# Altium PCB Dashboard.PcbDoc
Units mil, origin at the board's own origin, x right, y up, seen from the top; angles counter-clockwise.
Board outline 7400 x 4450 mil, 2 copper layers (Top Layer, Bottom Layer), stack 61.8 mil thick; 47 components, 44 nets, 205 pads, 0 vias.
Unrouted connection lines stored in the file: 118.
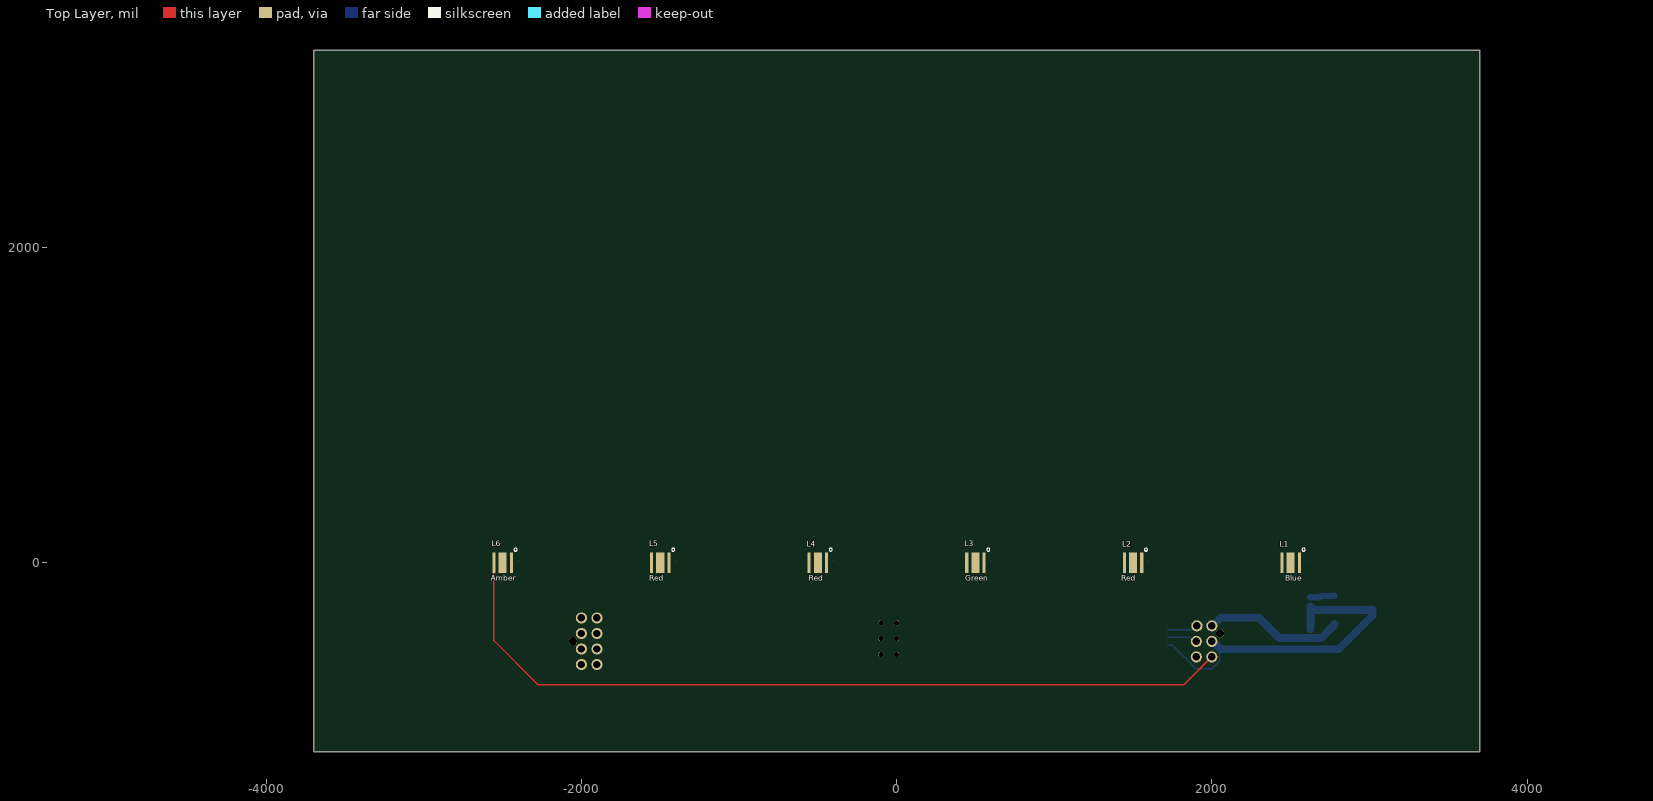
[diagram p0: Top Layer view]
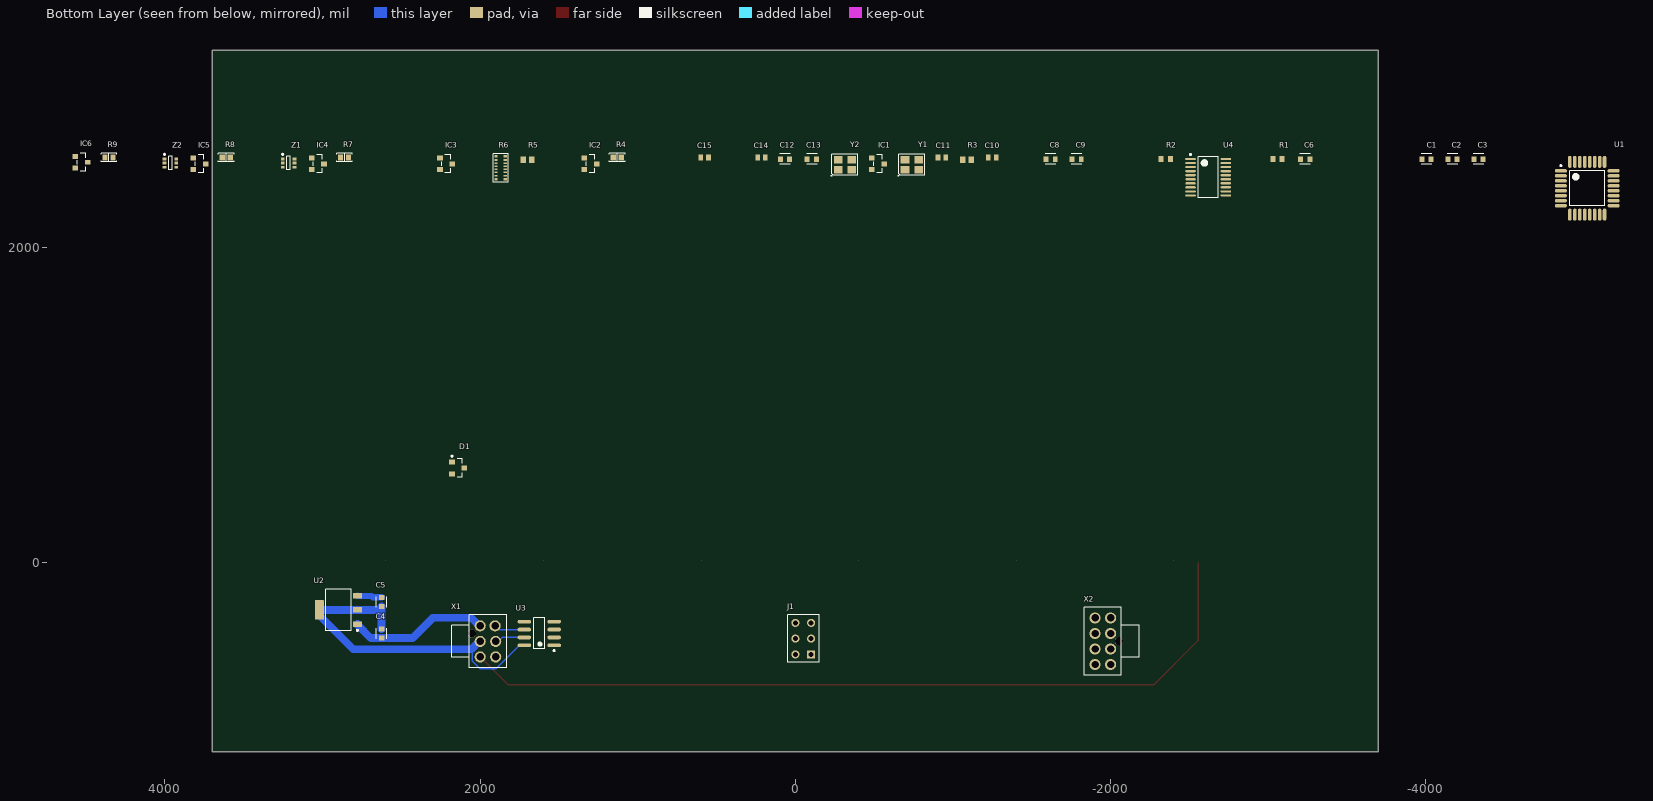
[diagram p1: Bottom Layer view, seen from below]

## Layer stack, top to bottom
Top Solder: solder mask 0.4, Solder Resist, Dk 3.5
Top Layer: signal copper 1.4
Dielectric 1: core 59, Core-043, Dk 4.3
Bottom Layer: signal copper 1.4
Bottom Solder: solder mask 0.4, Solder Resist, Dk 3.5

## Board outline
-3700,-1200 3700,-1200 3700,3250 -3700,3250

## Design rules (kind name [scope] priority, off if disabled: settings)
BoardOutlineClearance [All] p1: gap=7.87 ignorepadtopadclearanceinfootprint=FALSE except(15.75: Arc-SplitBarrior Arc-SplitContinuation Track-SplitBarrior Track-SplitContinuation SMDPad-SplitBarrior SMDPad-SplitContinuation THPad-SplitBarrior THPad-SplitContinuation Via-SplitBarrior Via-SplitContinuation Fill-SplitBarrior Fill-SplitContinuation Poly-SplitBarrior Poly-SplitContinuation Region-SplitBarrior Region-SplitContinuation Text-SplitBarrior Text-SplitContinuation)
Clearance "Clearance Bottom Layer" [OnLayer('Bottom Layer')] p1: gap=8 ignorepadtopadclearanceinfootprint=FALSE except(10: Arc-Text Track-Text SMDPad-Text THPad-Text Via-Text Fill-Text Poly-Text Region-Text Text-Text)
Clearance "Clearance Top Layer" [OnLayer('Top Layer')] p2: gap=8 ignorepadtopadclearanceinfootprint=FALSE except(10: Arc-Text Track-Text SMDPad-Text THPad-Text Via-Text Fill-Text Poly-Text Region-Text Text-Text)
Clearance [All] p3: gap=7.87 ignorepadtopadclearanceinfootprint=FALSE except(3.5: Arc-Arc Arc-Track Arc-SMDPad Track-Track Track-SMDPad SMDPad-SMDPad; 5: Arc-Via Track-Via SMDPad-Via THPad-Via Via-Via; 10: Arc-Text Track-Text SMDPad-Text THPad-Text Via-Text Fill-Text Poly-Text Region-Text Text-Text)
HoleSize [All] p1: absolutevalues=TRUE maxlimit=248.03 minlimit=7.87 maxpercent=80.000 minpercent=20.000
MinimumAnnularRing [All] p1: minimumring=3
MinimumSolderMaskSliver [All] p1: minsoldermaskwidth=3.94
PolygonConnect PolygonConnect_1 [All] p1: thpad.connectstyle=Relief thpad.reliefconductorwidth=20 thpad.reliefentries=4 thpad.polygonreliefangle="90 Angle" thpad.airgapwidth=10 smdpad.connectstyle=Relief smdpad.reliefconductorwidth=20 smdpad.reliefentries=4 smdpad.polygonreliefangle="90 Angle" smdpad.airgapwidth=10 via.connectstyle=Direct via.reliefconductorwidth=20 via.reliefentries=4 via.polygonreliefangle="90 Angle" via.airgapwidth=10
RoomDefinition Dashboard [InComponentClass('Dashboard')] p1 off: confinementstyle=ConfineIn formatcopy=TRUE lockcomponents=FALSE outline -5250,-1650 -3250,-1650 -3250,-650 -5250,-650
RoutingCorners [All] p1: cornerstyle=Round minsetback=100 maxsetback=100
RoutingVias [All] p1: holewidth=19.68 width=39.37 viastyle="Through Hole" minholewidth=7.87 minwidth=17.72 maxholewidth=39.37 maxwidth=78.74
SilkToSilkClearance [All] p1: silktosilkclearance=3.94
SilkToSolderMaskClearance [IsPad] p1: minsilkscreentomaskgap=3.94 clearancetoexposedcopper=TRUE
SolderMaskExpansion [All] p1: expansion=4 istentingtop=FALSE
Width Width_GND [InNet('GND')] p1: maxlimit=50 minlimit=10 preferedwidth=30
Width Width_12V [InNet('+12')] p2: maxlimit=100 minlimit=20 preferedwidth=50 minimp=50.000000 maximp=50.000000 favimp=50.000000
Width Width_5V [InNet('+5')] p3: maxlimit=40 minlimit=20 preferedwidth=32
Width [All] p4: maxlimit=10 minlimit=10 preferedwidth=10
25 further rules are at their usual default settings.

## Components (designator, comment, footprint, x,y, rotation, side; value= is the part's Value field where it differs from the comment)
C1 "CC0603KRX7R7BB104" FP-CC0603-DA-MFG -4004.38,2560 r180 bottom value="100 nF"
C2 "CC0603KRX7R7BB104" FP-CC0603-DA-MFG -4169.38,2560 r180 bottom value="100 nF"
C3 "CC0603KRX7R7BB104" FP-CC0603-DA-MFG -4334.38,2560 r180 bottom value="100 nF"
C4 "CC0603KRX7R8BB223" FP-CC0603-DA-MFG 2625,-450 r90 bottom value="22 nF"
C5 "CC0603KRX7R7BB104" FP-CC0603-DA-MFG 2625,-250 r270 bottom value="100 nF"
C6 "CC0603KRX7R7BB104" FP-CC0603-DA-MFG -3234.38,2560 r180 bottom value="100 nF"
C8 "CC0603KRX7R7BB104" FP-CC0603-DA-MFG -1619.38,2560 r180 bottom value="100 nF"
C9 "CC0603KRX7R7BB105" FP-CC0603-DA-MFG -1784.38,2560 r180 bottom value="1 uF"
C10 "06032U150GAT2A" CAPC1508X91X25LL25T13 -1249.38,2570 r180 bottom
C11 "06032U150GAT2A" CAPC1508X91X25LL25T13 -929.38,2570 r180 bottom
C12 "CC0603KRX7R7BB105" FP-CC0603-DA-MFG 65.62,2560 r180 bottom value="1 uF"
C13 "CC0603KRX7R7BB104" FP-CC0603-DA-MFG -104.38,2560 r180 bottom value="100 nF"
C14 "06032U150GAT2A" CAPC1508X91X25LL25T13 215.62,2570 r180 bottom
C15 "06032U150GAT2A" CAPC1508X91X25LL25T13 575.62,2570 r180 bottom
D1 "MMBZ5261ELT1G" ONSC-SOT-23-3-318-08_V 2139.37,600 r180 bottom
IC1 "DMG3406L-7" "DIODES SOT-23-3" -524.38,2530 r180 bottom
IC2 "DMG3406L-7" "DIODES SOT-23-3" 1300.62,2530 r180 bottom
IC3 "DMG3406L-7" "DIODES SOT-23-3" 2215.62,2530 r180 bottom
IC4 "DMG3406L-7" "DIODES SOT-23-3" 3030.62,2530 r180 bottom
IC5 "DMG3406L-7" "DIODES SOT-23-3" 3780.62,2530 r180 bottom
IC6 "DMG3406L-7" "DIODES SOT-23-3" 4530.62,2540 r180 bottom
J1 "AVR-ISP_Header" "AVR-ISP Header" 0,-482.68 r90 bottom locked
L1 "Blue" "Cree XLamp" 2500,0 r0 top locked
L2 "Red" "Cree XLamp" 1500,0 r0 top locked
L3 "Green" "Cree XLamp" 500,0 r0 top locked
L4 "Red" "Cree XLamp" -500,0 r0 top
L5 "Red" "Cree XLamp" -1500,0 r0 top locked
L6 "Amber" "Cree XLamp" -2500,0 r0 top locked
R1 "RC0603FR-0710KL" RESC1608X55X25ML10T15 -3059.38,2560 r180 bottom
R2 "RC0603FR-0710KL" RESC1608X55X25ML10T15 -2349.38,2560 r180 bottom
R3 "CRCW060310R0FKEA" RESC1609X50X30ML10T20 -1089.38,2555 r180 bottom
R4 "14.7 Ohms" "RES 0603_1608" 1130.62,2570 r180 bottom
R5 "CRCW060310R0FKEA" RESC1609X50X30ML10T20 1700.62,2555 r180 bottom
R6 "EXB-2HV103JV" "RESNET 1506-16 CONVEX" 1870.62,2505 r180 bottom
R7 "14.7 Ohms" "RES 0603_1608" 2860.62,2570 r180 bottom
R8 "14.7 Ohms" "RES 0603_1608" 3610.62,2570 r180 bottom
R9 "14.7 Ohms" "RES 0603_1608" 4355.62,2570 r180 bottom
U1 "ATmega328P-AU" 32A_M -5024.38,2375 r180 bottom
U2 "LM340MP-5.0/NOPB" DCY0004A_L 2900,-300 r0 bottom locked
U3 "MCP2551-I/SN" SOIC-SN8_N 1625,-450 r0 bottom
U4 "MCP2515-I/ST" TSSOP-ST20_N -2619.38,2445 r180 bottom
X1 "Nano-Fit Vertical 6" "Nano-Fit Vertical 6" 2000,-500 r270 bottom locked
X2 "Nano-Fit Vertical 8" "NANO-FIT VERTICAL 8" -2000,-499.21 r90 bottom locked
Y1 "16MHz" "NDK NX3225SA" -739.38,2525 r180 bottom
Y2 "16MHz" "NDK NX3225SA" -314.38,2525 r180 bottom
Z1 "MMBZ5245BTS-7-F" SOT-363 3215.62,2535 r180 bottom
Z2 "MMBZ5245BTS-7-F" SOT-363 3965.62,2535 r180 bottom

## Footprints (in the part's own frame and the unit in brackets; to place one, negate y for a bottom-side part, rotate by r counter-clockwise, add the part's x,y. Pads: shape width x height; smd on the part's side, far side on the other; paste and mask are expansions set on the pad)
32A_M [mm] "Thin QFP, 32-Leads, Body 7x7mm, Pitch 0.8mm, IPC Low Density"
  oval 1.95x0.6 smd: 1(-4.25,2.8) 2(-4.25,2) 3(-4.25,1.2) 4(-4.25,0.4) 5(-4.25,-0.4) 6(-4.25,-1.2) 7(-4.25,-2) 8(-4.25,-2.8) 17(4.25,-2.8) 18(4.25,-2) 19(4.25,-1.2) 20(4.25,-0.4) 21(4.25,0.4) 22(4.25,1.2) 23(4.25,2) 24(4.25,2.8)
  oval 0.6x1.95 smd: 9(-2.8,-4.25) 10(-2,-4.25) 11(-1.2,-4.25) 12(-0.4,-4.25) 13(0.4,-4.25) 14(1.2,-4.25) 15(2,-4.25) 16(2.8,-4.25) 25(2.8,4.25) 26(2,4.25) 27(1.2,4.25) 28(0.4,4.25) 29(-0.4,4.25) 30(-1.2,4.25) 31(-2,4.25) 32(-2.8,4.25)
  silkscreen extent -4.38,-2.85 2.85,3.77, body extent -3.5,-3.5 3.5,3.5, height 1.2
"AVR-ISP Header" [mm]
  round 1.308 / inner round 1.308 / far side round 0.8 hole 0.8: GND(2.54,0) MOSI(0,0) RST(2.54,-2.54) SCK(0,-2.54) VCC(-2.54,0)
  rect 1.308x1.308 / inner round 1.308 / far side round 0.8 hole 0.8: MISO(-2.54,-2.54)
  silkscreen extent -3.81,-3.81 3.81,1.27
CAPC1508X91X25LL25T13 [mm] "Chip Capacitor, 2-Leads, Body 1.52x0.76mm, IPC High Density"
  rect 0.74x0.92 smd: 1(-0.62,0) 2(0.62,0)
  body extent -0.88,-0.51 0.89,0.51, height 0.91
"Cree XLamp" [mm] "XP-E2"
  rect 1.3x3.3 smd: 3(0,0)
  rect 0.5x3.3 smd: V+(-1.4,0) V-(1.4,0)
  Keep-Out Layer region: 2.5,0.3
  silkscreen extent 1.83,1.83 2.34,2.34, body extent -1.72,-1.72 1.73,1.73, height 2.26
DCY0004A_L [mm] "SOT223, 4-Leads, Body 6.7x3.7mm, Pitch 2.3mm, IPC High Density"
  rrect11% 1.45x0.9 smd: 1(-3.075,2.3) 2(-3.075,0) 3(-3.075,-2.3)
  rrect7% 1.45x3.15 smd: 4(3.075,0)
  silkscreen extent -3.2,-3.35 2.05,3.42, body extent -3.5,-3.25 3.5,3.25, height 1.62
"DIODES SOT-23-3" [mm] "SOT23, 3-Leads, Body 2.90x2.40mm, Pitch 0.95mm, IPC Medium Density"
  rect 0.9x0.8 smd: 1(-1,0.95) 2(-1,-0.95) 3(1,0)
  silkscreen extent -0.7,-1.45 0.7,1.45, body extent -1.41,-1.45 1.41,1.45, height 1.5
FP-CC0603-DA-MFG [mm]
  rect 0.8x0.9 smd: 1(-0.75,0) 2(0.75,0)
  silkscreen extent -0.85,-0.85 0.85,0.85, body extent -0.8,-0.4 0.8,0.4, height 0.9
"Nano-Fit Vertical 6" [mm]
  round 1.8 hole 1.2: 1(-2.5,0) 2(0,0) 3(2.5,0) 4(-2.5,2.4) 5(0,2.5) 6(2.5,2.5)
  round 1.3 hole 1.3 unplated: 7(-1.25,-1.34)
  silkscreen extent -4.25,-4.6 4.25,4.25, body extent -4.22,-4.6 4.22,4.24, height 10.51
"NANO-FIT VERTICAL 8" [mm]
  round 1.8 hole 1.2: 1(-3.75,0) 2(-1.25,0) 3(1.25,0) 4(3.75,0) 5(-3.75,2.5) 6(-1.25,2.5) 7(1.25,2.5) 8(3.75,2.5)
  round 1.3 hole 1.3 unplated: 9(0,-1.34)
  silkscreen extent -5.5,-4.6 5.5,4.25, body extent -5.47,-4.57 5.47,4.27, height 10.51
"NDK NX3225SA" [mm] "Crystal, 4-Leads, Body 2.50x3.20mm, Pitch 2.20mm, IPC Medium Density"
  rect 1.4x1.2 smd: 1(-1.1,-0.8) 2(1.1,-0.8) 3(1.1,0.8) 4(-1.1,0.8)
  silkscreen extent -2.25,-1.85 2.1,1.7, body extent -1.61,-1.26 1.61,1.26, height 0.6
ONSC-SOT-23-3-318-08_V [mm] "SOT23, 3-Leads, Body 2.92x1.3mm, Pitch 0.95mm"
  rect 0.9x0.8 smd: 1(-1,0.95) 2(-1,-0.95) 3(1,0)
  silkscreen extent -1.13,-1.46 0.65,2.02, body extent -0.65,-1.46 0.65,1.46, height 1.11
"RES 0603_1608" [mm] "Chip Resistor, 2-Leads, Body 1.60x0.80mm, IPC Medium Density"
  rect 0.85x0.95 smd: 1(-0.65,0) 2(0.65,0)
  silkscreen extent -1.27,-0.7 1.27,0.7, body extent -0.8,-0.4 0.8,0.4, height 0.45
RESC1608X55X25ML10T15 [mm] "Chip Resistor, 2-Leads, Body 1.60x0.80mm, IPC Low Density"
  rect 0.8x1 smd: 1(-0.75,0) 2(0.75,0)
  body extent -0.85,-0.45 0.85,0.45, height 0.55
RESC1609X50X30ML10T20 [mm] "Chip Resistor, 2-Leads, Body 1.55x0.85mm, IPC Low Density"
  rect 0.9x1.05 smd: 1(-0.675,0) 2(0.675,0)
  body extent -0.82,-0.48 0.82,0.48, height 0.5
"RESNET 1506-16 CONVEX" [mm] "Array Chip Resistor, 16 leads, 8 resistors, Body 3.8x1.6mm Height 0.55mm"
  rect 0.5x0.425 smd: 1(-0.75,1.837) 8(-0.75,-1.837) 9(0.75,-1.837) 16(0.75,1.837)
  rect 0.5x0.25 smd: 2(-0.75,1.25) 3(-0.75,0.75) 4(-0.75,0.25) 5(-0.75,-0.25) 6(-0.75,-0.75) 7(-0.75,-1.25) 10(0.75,-1.25) 11(0.75,-0.75) 12(0.75,-0.25) 13(0.75,0.25) 14(0.75,0.75) 15(0.75,1.25)
  silkscreen extent -1.2,-2.3 1.2,2.3, body extent -0.82,-1.95 0.83,1.95, height 0.51
SOIC-SN8_N [mm] "SOIC, 8-Leads, Body 4.9x3.9mm, Pitch 1.27mm, IPC Medium Density"
  oval 2.2x0.6 smd: 1(-2.4,1.905) 2(-2.4,0.635) 3(-2.4,-0.635) 4(-2.4,-1.905) 5(2.4,-1.905) 6(2.4,-0.635) 7(2.4,0.635) 8(2.4,1.905)
  silkscreen extent -2.52,-2.5 0.9,2.88, body extent -2,-2.5 2,2.5, height 1.75
SOT-363 [mm]
  rect 0.6x0.42 smd: 1(-0.95,0.65) 2(-0.95,0) 3(-0.95,-0.65) 4(0.95,-0.65) 5(0.95,0) 6(0.95,0.65)
  silkscreen extent -1.08,-1.1 0.3,1.53, body extent -1.06,-1.1 1.06,1.1, height 1.05
TSSOP-ST20_N [mm] "TSOP, 20-Leads, Body 6.5x4.4mm, Pitch 0.65mm, IPC Medium Density"
  oval 1.7x0.35 smd: 1(-2.85,2.925) 2(-2.85,2.275) 3(-2.85,1.625) 4(-2.85,0.975) 5(-2.85,0.325) 6(-2.85,-0.325) 7(-2.85,-0.975) 8(-2.85,-1.625) 9(-2.85,-2.275) 10(-2.85,-2.925) 11(2.85,-2.925) 12(2.85,-2.275) 13(2.85,-1.625) 14(2.85,-0.975) 15(2.85,-0.325) 16(2.85,0.325) 17(2.85,0.975) 18(2.85,1.625) 19(2.85,2.275) 20(2.85,2.925)
  silkscreen extent -2.98,-3.3 1.6,3.77, body extent -2.25,-3.3 2.25,3.3, height 1.2

## Part data
C1 C2 C3 C5 C6 C8 C13: library part CMP-03422-000030-1, "CAP CER 0.1UF 16V X7R 0603", Capacitance="100 nF", Manufacturer=YAGEO, Package=CC0603-DA, Temperature="-55°C to +125°C", Temperature Characteristic=X7R, Temperature Coefficient=15%, Temperature Range High=+125°C, Temperature Range Low=-55°C, Tolerance=0.1, Voltage="16 V", Automotive=No, Category=Cap, ComponentLink2Description=Datasheet, ComponentLink2URL=http://www.yageo.com/documents/recent/UPY-GPHC_X7R_6.3V-to-50V_18.pdf, Device Class L1="Passive Components", Device Class L2=Capacitors, Device Class L3="Ceramic Capacitors", Digikey Description="CAP CER 0.1UF 16V X7R 0603", Footprint Url=http://www.yageo.com/exep/pages/download/literatures/UPY-C_GEN_24.pdf, Height=0.9mm, Lead Free=Yes, Manufacturer Part Number=CC0603KRX7R7BB104, Material=Ceramic, Mouser Description="Multilayer Ceramic Capacitor, CC Series, 0.1 - F, - 10%, X7R, 16 V, 0603 [1608 Metric]", Octopart=https://octopart.com/cc0603krx7r7bb104-yageo-192941, RoHS=TRUE, Voltage Rating="16 V"
C4: library part CMP-03422-001178-1, "CAP CER 0.022UF 25V X7R 0603", Capacitance="22 nF", Manufacturer=YAGEO, Package=CC0603-DA, Temperature="-55°C to +125°C", Temperature Characteristic=X7R, Temperature Coefficient=15%, Temperature Range High=+125°C, Temperature Range Low=-55°C, Tolerance=0.1, Voltage="25 V", Automotive=No, Category=Cap, ComponentLink2Description=Datasheet, ComponentLink2URL=http://www.yageo.com/documents/recent/UPY-GPHC_X7R_6.3V-to-50V_18.pdf, Device Class L1="Passive Components", Device Class L2=Capacitors, Device Class L3="Ceramic Capacitors", Digikey Description="CAP CER 0.022UF 25V X7R 0603", Footprint Url=http://www.yageo.com/exep/pages/download/literatures/UPY-C_GEN_24.pdf, Height=0.9mm, Lead Free=Yes, Manufacturer Part Number=CC0603KRX7R8BB223, Material=Ceramic, Mouser Description="Multilayer Ceramic Capacitors MLCC - SMD/SMT 22nF 25V X7R 10%", Octopart=https://octopart.com/cc0603krx7r8bb223-yageo-39467728, RoHS=TRUE, Voltage Rating="25 V"
C9 C12: library part CMP-03422-000924-1, "CAP CER 1UF 16V X7R 0603", Capacitance="1 uF", Manufacturer=YAGEO, Package=CC0603-DA, Temperature="-55°C to +125°C", Temperature Characteristic=X7R, Temperature Coefficient=15%, Temperature Range High=+125°C, Temperature Range Low=-55°C, Tolerance=0.1, Voltage="16 V", Automotive=No, Category=Cap, ComponentLink2Description=Datasheet, ComponentLink2URL=http://www.yageo.com/documents/recent/UPY-GPHC_X7R_6.3V-to-50V_18.pdf, Device Class L1="Passive Components", Device Class L2=Capacitors, Device Class L3="Ceramic Capacitors", Digikey Description="CAP CER 1UF 16V X7R 0603", Footprint Url=http://www.yageo.com/exep/pages/download/literatures/UPY-C_GEN_24.pdf, Height=0.9mm, Lead Free=Yes, Manufacturer Part Number=CC0603KRX7R7BB105, Material=Ceramic, Mouser Description="Multilayer Ceramic Capacitor, CC Series, 1 - F, - 10%, X7R, 16 V, 0603 [1608 Metric]", Octopart=https://octopart.com/cc0603krx7r7bb105-yageo-42271928, RoHS=TRUE, Voltage Rating="16 V"
C10 C11 C14 C15: library part CMP-2006-04659-1, Manufacturer="AVX Interconnect / Elco", Part Number=06032U150GAT2A
D1: library part CMP-1060-01202-1, "Zener Voltage Regulator, 225 mW, 3-Pin SOT-23, Pb-Free, Tape and Reel", Manufacturer="On Semiconductor", ComponentLink1Description="Manufacturer URL", ComponentLink1URL=http://www.onsemi.com/, ComponentLink2Description=Datasheet, ComponentLink2URL=http://www.onsemi.cn/pub_link/Collateral/MMBZ5221ELT1-D.PDF, ComponentLink3Description="Package Specification", ComponentLink3URL=http://www.onsemi.cn/pub_link/Collateral/318-08.PDF, DatasheetVersion="Rev. 7", Mounting Technology="Surface Mount", PackageDescription="3-Pin Small Outline Transistor, Body 2.92 x 1.3 mm, Pitch 0.95 mm", PackageReference=SOT-23-3-318-08, PackageVersion="Rev. AP, 11/2009", Packing="Tape and Reel", PartNumber=MMBZ5261ELT1G, RoHS=Pb-Free, VZ Typ (V)=47
IC1 IC2 IC3 IC4 IC5 IC6: "MOSFET N-CH 30V 3.6A SOT23", Current - Continuous Drain (Id) @ 25°C="3.6A (Ta)", Device Package="TO-236-3, SC-59, SOT-23-3", Drain to Source Voltage (Vdss)=30V, Drive Voltage (Max Rds On,  Min Rds On)="4.5V, 10V", Input Capacitance (Ciss) (Max) @ Vds="495pF @ 15V", Manufacturer="Diodes Incorporated", Operating Temperature="-55°C ~ 150°C (TJ)", Power Dissipation (Max)="770mW (Ta)", Supplier Device Package=SOT-23, Supplier Part Number 1=DMG3406L-7DICT-ND, ComponentLink1Description=Datasheet, ComponentLink1URL=https://www.diodes.com/assets/Datasheets/DMG3406L.pdf, ComponentLink2Description="DigiKey Link", ComponentLink2URL=http://digikey.com/product-detail/en/diodes-incorporated/DMG3406L-7/DMG3406L-7DICT-ND/5223238, FET Type=N-Channel, Gate Charge (Qg) (Max) @ Vgs="11.2nC @ 10V", LastUpdated="1/21/2020 4:00:19 AM", Lifecycle Status=Active, Minimum Order=1, Mounting Type="Surface Mount", Package / Case="TO-236-3, SC-59, SOT-23-3", Packaging=TapeAndReel, Part Number=DMG3406L-7, Part Status=Active, Price=0.08, Rds On (Max) @ Id, Vgs="50mOhm @ 3.6A, 10V", Series=-, Supplier 1=DigiKey, Technology="MOSFET (Metal Oxide)", Vgs (Max)=±20V, Vgs(th) (Max) @ Id="2V @ 250µA"
L1: library part "LED - Blue Xlamp", "Blue LED Cree XLamp XP-E2 / XPEBBL-L1-0000-00Y01", Supplier Part Number 1=XPEBBL-L1-0000-00Y01CT-ND, Supplier Part Number 10=XPEBBL-L1-0000-00Y01-ND, Supplier 1=Digi-Key, Supplier 2=Digi-Key, Supplier 3=Mouser, Supplier 4=Avnet, Supplier 5=Digi-Key, Supplier 6=RSComponents, Supplier 7=RSComponents, Supplier 8=RSComponents, Supplier 9=Arrow, Supplier 10=Digi-Key, Supplier Part Number 2=XPEBBL-L1-0000-00Y01DKR-ND, Supplier Part Number 3=941-XPEBBLL10000Y01, Supplier Part Number 4=XPEBBL-L1-0000-00Y01, Supplier Part Number 5=XPEBBL-L1-0000-00Y01TR-ND, Supplier Part Number 6=9076677, Supplier Part Number 7=9076677P, Supplier Part Number 8=1629932, Supplier Part Number 9=XPEBBL-L1-0000-00Y01
L2 L4 L5: library part "LED - Red XLlamp", "Red LED Cree XLamp XP-E2 / XPEBRD-L1-R250-00502", Supplier Part Number 1=941-XPEBRDL1R250502, Supplier 1=Mouser, Supplier 2=Avnet, Supplier 3=Digi-Key, Supplier 4=Arrow, Supplier Part Number 2=XPEBRD-L1-R250-00502, Supplier Part Number 3=XPEBRD-L1-R250-00502-ND, Supplier Part Number 4=XPEBRD-L1-R250-00502
L3: library part "LED - Green Xlamp", "Green LED Cree XLamp XP-E2 / XPEBGR-L1-0000-00A01", Supplier Part Number 1=XPEBGR-L1-0000-00A01CT-ND, Supplier Part Number 10=2839922RL, Supplier Part Number 11=XPEBGR-L1-0000-00A01-ND, Supplier 1=Digi-Key, Supplier 2=Digi-Key, Supplier 3=Digi-Key, Supplier 4=Arrow, Supplier 5=Newark, Supplier 6=Mouser, Supplier 7=Newark, Supplier 8=Avnet, Supplier 9=Farnell, Supplier 10=Farnell, Supplier 11=Digi-Key, Supplier Part Number 2=XPEBGR-L1-0000-00A01DKR-ND, Supplier Part Number 3=XPEBGR-L1-0000-00A01TR-ND, Supplier Part Number 4=XPEBGR-L1-0000-00A01, Supplier Part Number 5=49AC0942, Supplier Part Number 6=941-XPEBGRL10000A01, Supplier Part Number 7=95W0598, Supplier Part Number 8=XPEBGR-L1-0000-00A01, Supplier Part Number 9=2839922
L6: library part "LED - Amber Xlamp", "Amber LED Cree XLamp XP-E2 / XPEBAM-L1-0000-00601", Supplier Part Number 1=XPEBAM-L1-0000-00601CT-ND, Supplier Part Number 10=2839920RL, Supplier Part Number 11=XPEBAM-L1-0000-00601-ND, Supplier 1=Digi-Key, Supplier 2=Digi-Key, Supplier 3=Arrow, Supplier 4=Newark, Supplier 5=Newark, Supplier 6=Avnet, Supplier 7=Mouser, Supplier 8=Digi-Key, Supplier 9=Farnell, Supplier 10=Farnell, Supplier 11=Digi-Key, Supplier Part Number 2=XPEBAM-L1-0000-00601DKR-ND, Supplier Part Number 3=XPEBAM-L1-0000-00601, Supplier Part Number 4=49AC0940, Supplier Part Number 5=95W0551, Supplier Part Number 6=XPEBAM-L1-0000-00601, Supplier Part Number 7=941-XPEBAML10000601, Supplier Part Number 8=XPEBAM-L1-0000-00601TR-ND, Supplier Part Number 9=2839920
R1 R2: library part CMP-2100-03664-1, "Chip Resistor, 10 KOhm, +/- 1%, 01 W, -55 to 155 degC, 0603 (1608 Metric), RoHS, Tape and Reel", Case Code (Imperial)=0603, Case Code (Metric)=1608, Manufacturer=Yageo, Max Operating Temperature=155degC, Min Operating Temperature=-55degC, Package Description="2-Pin Surface Mount Device, Body 1.6 x 0.8 mm", Power Rating=100mW, Resistance=10KOhm, Temperature Coefficient=100ppm/degreesC, Tolerance=1%, Voltage Rating=75V, Voltage Rating (DC)=50V, Case/Package=0603, Composition=ThickFilm, Datasheet URL=http://www.yageo.com/NewPortal/yageodocoutput?fileName=/pdf/R-Chip/PYu-RC_Group_51_RoHS_L_5.pdf, Datasheet Version="Rev. 5, 10/2016", Depth=0.8mm, Height=0.45mm, Lead Free=LeadFree, Lead Pitch=0.3mm, Length=1.6mm, Manufacturer URL=http://www.yageo.com/, Military Standard=Not, Number of Pins=2, Package Reference=0603, Packaging=TapeandReel, REACH SVHC=NoSVHC, RoHSCompliant=true, Termination=SMD/SMT, Weight=7.1E-05oz, Width=0.8mm
R3 R5: library part CMP-2000-03845-1, Manufacturer="Vishay Dale", Part Number=CRCW060310R0FKEA
R4 R7 R8 R9: library part ERJ-3EKF14R7V, "RES SMD 14.7 OHM 1% 1/10W 0603", Device Package="0603 (1608 Metric)", Manufacturer="Panasonic Electronic Components", Operating Temperature="-55°C ~ 155°C", Power (Watts)="0.1W, 1/10W", Ratings=AEC-Q200, Supplier Device Package=0603, Supplier Part Number 1=P14.7HCT-ND, Temperature Coefficient=±100ppm/°C, Tolerance=±1%, ComponentLink1Description=Datasheet, ComponentLink1URL=https://industrial.panasonic.com/cdbs/www-data/pdf/RDA0000/AOA0000C304.pdf, ComponentLink2Description="DigiKey Link", ComponentLink2URL=http://digikey.com/product-detail/en/panasonic-electronic-components/ERJ-3EKF14R7V/P14.7HCT-ND/198163, Composition="Thick Film", Features="Automotive AEC-Q200", Height - Seated (Max)="0.022\" (0.55mm)", LastUpdated="1/21/2020 12:14:34 AM", Lifecycle Status=Active, Minimum Order=1, Number of Terminations=2, Package / Case="0603 (1608 Metric)", Packaging=TapeAndReel, Part Number=ERJ-3EKF14R7V, Part Status=Active, PartId=26262, Price=0.01, Resistance="14.7 Ohms", Series=ERJ, Size / Dimension="0.063\" L x 0.031\" W (1.60mm x 0.80mm)", Supplier 1=DigiKey
R6: "RES ARRAY 8 RES 10K OHM 1506", Device Package="1506, Convex, Long Side Terminals", Manufacturer="Panasonic Electronic Components", Number of Resistors=8, Operating Temperature="-55°C ~ 125°C", Power Per Element=62.5mW, Resistance (Ohms)=10k, Supplier Device Package=1506, Supplier Part Number 1=Y1103CT-ND, Temperature Coefficient=±200ppm/°C, Tolerance=±5%, Applications="Automotive AEC-Q200", Circuit Type=Isolated, ComponentLink1Description=Datasheet, ComponentLink1URL=https://industrial.panasonic.com/cdbs/www-data/pdf/AOC0000/AOC0000C14.pdf, ComponentLink2Description="DigiKey Link", ComponentLink2URL=http://digikey.com/product-detail/en/panasonic-electronic-components/EXB-2HV103JV/Y1103CT-ND/285393, Height - Seated (Max)="0.022\" (0.55mm)", LastUpdated="1/21/2020 3:39:13 AM", Lifecycle Status=Active, Minimum Order=1, Mounting Type="Surface Mount", Number of Pins=16, Package / Case="1506, Convex, Long Side Terminals", Packaging=TapeAndReel, Part Number=EXB-2HV103JV, Part Status=Active, PartId=657, Price=0.03, Series=EXB, Size / Dimension="0.150\" L x 0.063\" W (3.80mm x 1.60mm)", Supplier 1=DigiKey
U1: library part CMP-0095-00269-2, "8-bit AVR Microcontroller, 32KB Flash, 1KB EEPROM, 2KB SRAM, 32-pin TQFP, Industrial Grade (-40°C to 85°C)", Code_JEDEC=MS-026-ABA, ComponentLink1Description="Manufacturer URL", ComponentLink1URL=http://www.atmel.com/, ComponentLink2Description="ATmega48A/48PA/88A/88PA/168A/168PA/328/328P Datasheet", ComponentLink2URL=http://www.atmel.com/dyn/resources/prod_documents/doc8271.pdf, ComponentLink3Description="ATmega48A/48PA/88A/88PA/168A/168PA/328/328P Summary", ComponentLink3URL=http://www.atmel.com/dyn/resources/prod_documents/8271S.pdf, DatasheetVersion="revD, May-2011", PackageDescription="32-Lead, 7x7x1.0 mm Body, 0.8mm Lead Pitch, Thin Profile Plastic Quad Flat Package (TQFP)", PackageReference=32A, PackageVersion="revC, Oct-2010", RevisionNote="DatasheetVersion & PackageVersion updated. URLs added."
U2: library part CMP-0062-01784-3, "Series 3-Terminal Positive Regulators, 4-pin SOT-223, Pb-Free", Manufacturer="Texas Instruments", PackageTopMarking=XYTT*N00A, PowerWise=N, Code_IPC=SOT223-4, Code_JEDEC=TO-261-AA, ComponentLink1Description="Datasheet URL", ComponentLink1URL=http://www.ti.com/general/docs/lit/getliterature.tsp?genericPartNumber=LM340-N&fileType=pdf, CompType="LDO IC", PackageDescription="Molded SOT-223, 6.50 x 3.56 x 1.6mm Body, 4 Lead, 2.3mm Pitch", PackageReference=DCY0004A, PinCount=4, RoHS=Y
U3: library part CMP-0186-00138-2, "High-Speed CAN Transceiver, 8-Pin SOIC, Industrial Temperature", Code_IPC=SOIC127P600-8, Code_JEDEC=MS-012, ComponentLink1Description="Manufacturer URL", ComponentLink1URL=http://www.microchip.com/, ComponentLink2Description=Datasheet, ComponentLink2URL=http://ww1.microchip.com/downloads/en/DeviceDoc/21667F.pdf, ComponentLink3Description="Package Specification", ComponentLink3URL=http://www.microchip.com/stellent/groups/techpub_sg/documents/packagingspec/en012702.pdf, DatasheetVersion="revF, Jul-2010", PackageDescription="8-Lead Plastic Small Outline (SN) - Narrow, 3.90mm Body [SOIC]", PackageReference=SOIC-SN8, PackageVersion="revBB, Aug-2009", RevisionNote="URLs added. DatasheetVersion updated."
U4: library part CMP-0186-00077-2, "Stand-Alone CAN Controller With SPI Interface, 20-Pin TSSOP, Industrial Temperature", Code_JEDEC=MO-153-AC, ComponentLink1Description="Manufacturer URL", ComponentLink1URL=http://www.microchip.com/, ComponentLink2Description=Datasheet, ComponentLink2URL=http://ww1.microchip.com/downloads/en/DeviceDoc/21801f.pdf, ComponentLink3Description="Package Specification", ComponentLink3URL=http://www.microchip.com/stellent/groups/techpub_sg/documents/packagingspec/en012702.pdf, DatasheetVersion="revF, Oct-2010", PackageDescription="20-Lead Plastic Thin Shrink Small Outline (ST) - 4.4mm Body [TSSOP]", PackageReference=TSSOP-ST20, PackageVersion="revBB, Aug-2009", RevisionNote="URLs added. DatasheetVersion updated."
Y1 Y2: library part NX3225SA-16.000000MHZ-T1, "CRYSTAL 16.0000MHZ 10PF SMD", Device Package="4-SMD, No Lead", ESR (Equivalent Series Resistance)="60 Ohms", Frequency Stability=±10ppm, Load Capacitance=10pF, Manufacturer="NDK America, Inc.", Operating Mode=Fundamental, Operating Temperature="-20°C ~ 70°C", Supplier Part Number 1=644-1100-1-ND, ComponentLink1Description=Datasheet, ComponentLink1URL="//media.digikey.com/pdf/Data Sheets/NDK PDFs/NX3225SA-16.000000MHz-T1.pdf", ComponentLink2Description="DigiKey Link", ComponentLink2URL=http://digikey.com/product-detail/en/ndk-america-inc/NX3225SA-16.000000MHZ-T1/644-1100-1-ND/1468361, Frequency=16MHz, Frequency Tolerance=±10ppm, Height - Seated (Max)="0.028\" (0.70mm)", LastUpdated="1/21/2020 3:23:16 AM", Lifecycle Status=Active, Minimum Order=1, Mounting Type="Surface Mount", Package / Case="4-SMD, No Lead", Packaging=TapeAndReel, Part Number=NX3225SA-16.000000MHZ-T1, Part Status=Active, PartId=592, Price=0.47, Series=NX3225SA, Size / Dimension="0.126\" L x 0.098\" W (3.20mm x 2.50mm)", Supplier 1=DigiKey, Type="MHz Crystal"
Z1 Z2: "Three independent zener diodes in an array", Supplier Part Number 1=MMBZ5245BTS-7-FDICT-ND, ComponentLink1Description="New link", Supplier 1=Digi-Key, Supplier 2=Digi-Key, Supplier 3=Digi-Key, Supplier 4=Mouser, Supplier 5=Avnet, Supplier 6=Arrow, Supplier 7=Digi-Key, Supplier Part Number 2=MMBZ5245BTS-7-FDIDKR-ND, Supplier Part Number 3=MMBZ5245BTS-7-FDITR-ND, Supplier Part Number 4=621-MMBZ5245BTS-7-F, Supplier Part Number 5=MMBZ5245BTS-7-F, Supplier Part Number 6=MMBZ5245BTS-7-F, Supplier Part Number 7=MMBZ5245BTS-7-F-ND

## Nets (pads, with @x,y where several pads share a name; then routed paths per layer and width w, separated by ;. In a path a pad name is that pad's centre, name@x,y a point inside that pad or via, vN(x,y) a via of type N, cw(c..) or ccw(c..) an arc to the next point about the centre after c; other vN are vias at no path point)
+5: C1.1 C2.1 C3.1 C5.1 C8.1 C9.1 C12.1 C13.1 J1.VCC L1.V+ L2.V+ L3.V+ L4.V+ L5.V+ R1.1 R2.1 U1.4 U1.6 U1.18 U2.3 U3.3 U4.20 | length 158.5
  Bottom Layer w40: C5.1 2681.65,-220.47 2690.39,-211.73 2776.65,-211.73 U2.3
+12: C4.1 D1.3 U2.1 X1.1 X2.1 | length 893
  Bottom Layer w50: X1.1 2005.65,-401.57 2057.22,-350 2300,-350 2429.53,-479.53 C4.1 2693.7,-479.53 2778.94,-394.29 U2.1
GND: C1.2 C2.2 C3.2 C4.2 C5.2 C6.2 C8.2 C9.2 C12.2 C13.2 C14.1 C15.1 IC1.3 IC2.3 IC3.3 IC4.3 IC5.3 IC6.3 J1.GND R6.11 R6.12 R6.13 R6.14 R6.15 R6.16 R9.2 U1.3 U1.5 U1.21 U2.2 U2.4 U3.2 U3.8 U4.10 X1.2 X2.8 Y1.2 Y2.4 Z1.1 Z1.2 Z1.3 Z2.1 Z2.2 Z2.3 | length 2269.5
  Bottom Layer w10: U3.8 1750.98,-525 1900.98,-675 2000,-675 2050,-625 2050,-550 X1.2
  Bottom Layer w50: X1.2 2005.65,-500 2055.65,-550 2804.53,-550 3021.06,-333.46 U2.4 U2.2 2645.47,-300 C5.2 2625,-300 C4.2
NetC6_1: C6.1 U1.20
NetC10_1: C10.1 U4.9 Y1.1
NetC10_2: C10.2 Y1.4
NetC11_1: C11.1 Y2.2
NetC11_2: C11.2 U1.7 Y2.3
NetC14_2: C14.2 U4.8 Y1.3
NetC15_2: C15.2 U1.8 Y2.1
NetD1_1: D1.1 IC6.2 X2.4
NetIC1_1: IC1.1 R6.1 U1.2 Z1.4
NetIC1_2: IC1.2 R3.2
NetIC2_1: IC2.1 R6.2 U1.1 Z1.5
NetIC2_2: IC2.2 R4.2
NetIC3_1: IC3.1 R6.3 U1.32 Z1.6
NetIC3_2: IC3.2 R5.2
NetIC4_1: IC4.1 R6.4 U1.31 Z2.4
NetIC4_2: IC4.2 R7.2
NetIC5_1: IC5.1 R6.5 U1.30 Z2.5
NetIC5_2: IC5.2 R8.2
NetIC6_1: IC6.1 R6.6 U1.28 Z2.6
NetJ1_MISO: J1.MISO U1.16 U4.17
NetJ1_MOSI: J1.MOSI U1.15 U4.16
NetJ1_SCK: J1.SCK U1.17 U4.14
NetL1_2: L1.V- R3.1
NetL2_2: L2.V- R4.1
NetL3_2: L3.V- R5.1
NetL4_2: L4.V- R7.1
NetL5_2: L5.V- R8.1
NetL6_1: L6.V+ X1.3 | length 5239.2
  Top Layer w10: L6.V+ -2555.12,-494.88 -2275,-775 1823.43,-775 X1.3
NetL6_2: L6.V- R9.1
NetR1_2: R1.2 U1.29
NetR2_2: R2.2 U4.19
NetU1_14: U1.14 U4.18
NetU1_23: U1.23 X2.2
NetU1_24: U1.24 X2.5
NetU1_25: U1.25 X2.3
NetU1_26: U1.26 X2.6
NetU1_27: U1.27 X2.7
NetU3_1: U3.1 U4.1
NetU3_4: U3.4 U4.2
NetU3_6: U3.6 X1.4 | length 195.7
  Bottom Layer w10: U3.6 1875,-425 1898.43,-401.57 X1.4
NetU3_7: U3.7 X1.5 | length 192.4
  Bottom Layer w10: U3.7 1860.1,-475 1885.1,-500 X1.5
pads on no net: D1.2 J1.RST L1.3 L2.3 L3.3 L4.3 L5.3 L6.3 R6.7 R6.8 R6.9 R6.10 U1.9 U1.10 U1.11 U1.12 U1.13 U1.19 U1.22 U3.5 U4.3 U4.4 U4.5 U4.6 U4.7 U4.11 U4.12 U4.13 U4.15 X1.6 X1.7 X2.9

## Silkscreen, mask and mechanical layers (free items; w line width, h text height)
Mechanical 1:
  lines w0.5: 0,600 0,1590.1 ; -526.48,1590.1 -386.09,600 ; -526.48,1590.1 -5786.23,844.28 -5645.84,-145.82 -386.09,600 ; -526.48,1590.1 526.48,1590.1 ; -386.09,600 386.09,600 ; 386.09,600 526.48,1590.1 ; 386.09,600 5645.84,-145.82 5786.23,844.28 526.48,1590.1